# Altium PCB sami_updated_v2_1.PcbDoc
Units mm, origin at the board's own origin, x right, y up, seen from the top; angles counter-clockwise.
Board outline 29.4 x 15.49 mm, 2 copper layers (Top Layer, Bottom Layer); 20 components, 23 nets, 104 pads, 44 vias.
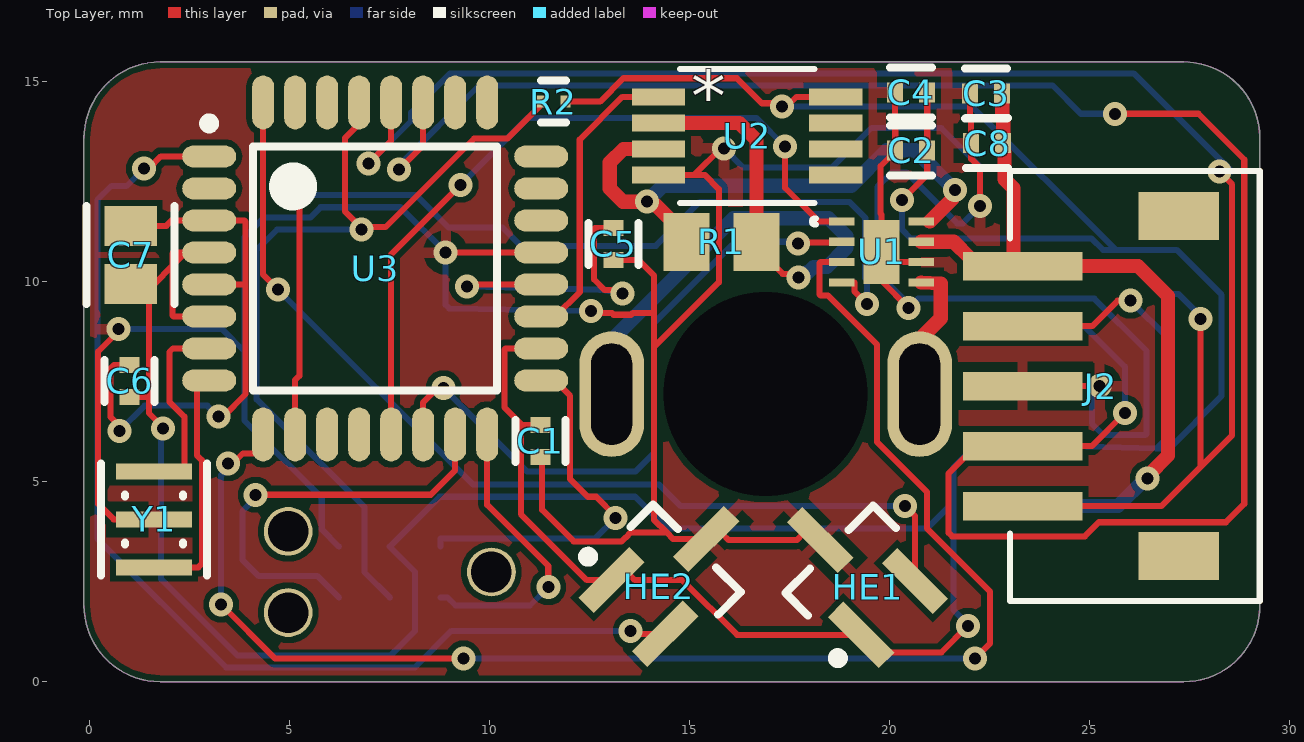
[diagram p0: Top Layer view]
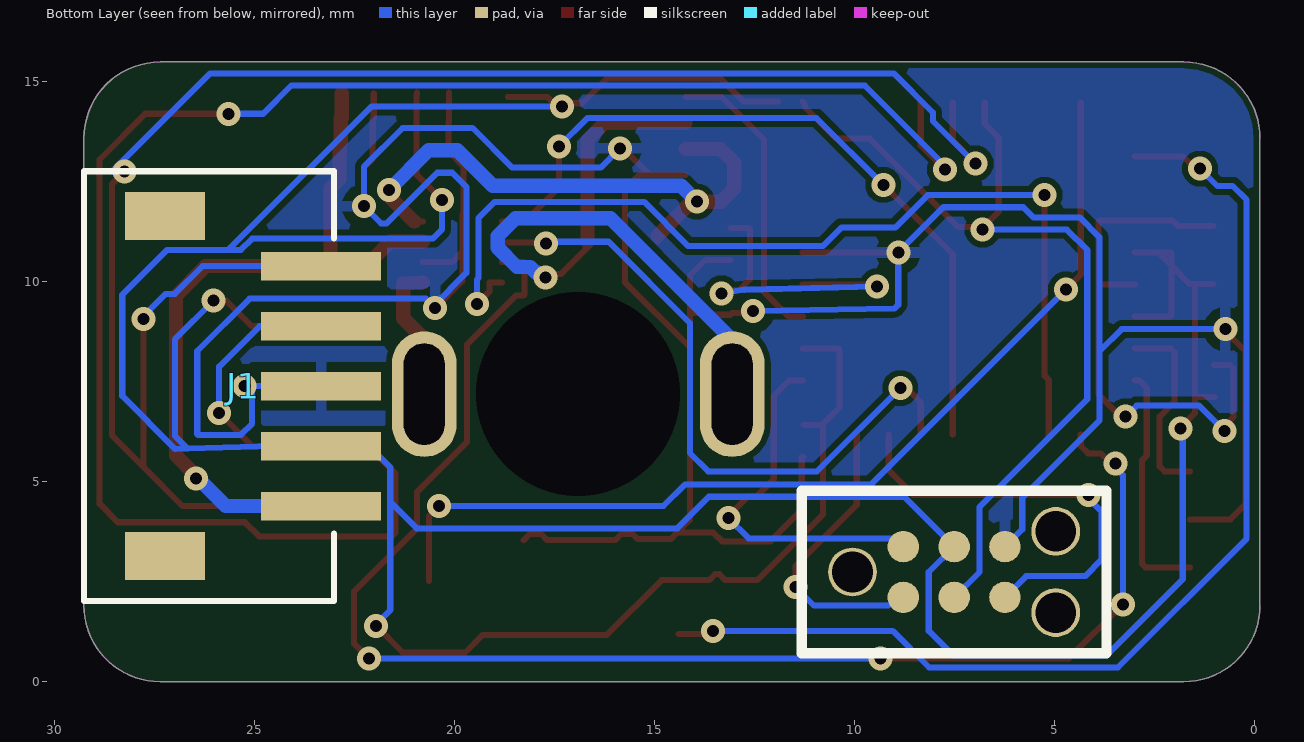
[diagram p1: Bottom Layer view, seen from below]
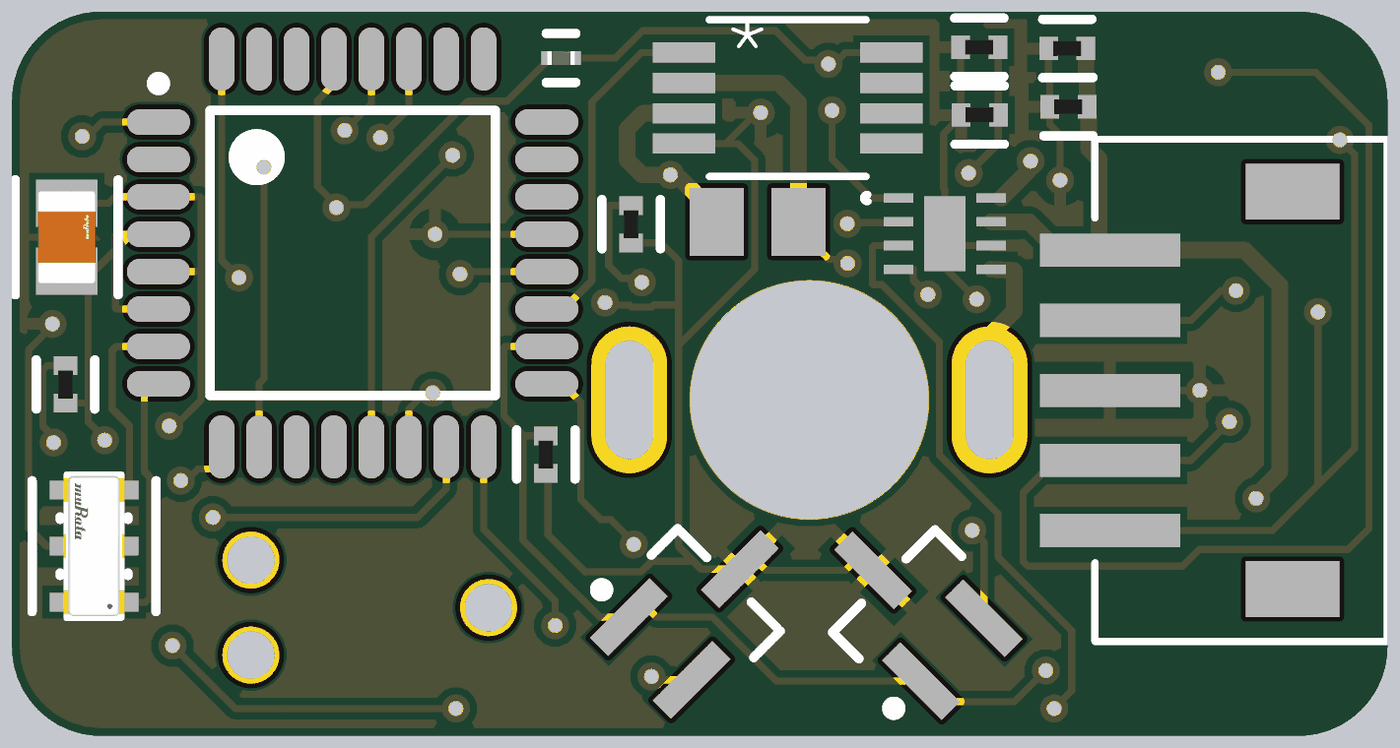
[diagram p2: 3D render of the assembled board from above, using the file's embedded part models]

## Layer stack, top to bottom
Top Solder: solder mask 0.0102, Solder Resist, Dk 3.5
Top Layer: signal copper 0.0356
Dielectric 1: dielectric 0.32, FR-4, Dk 4.8
Bottom Layer: signal copper 0.0356
Bottom Solder: solder mask 0.0102, Solder Resist, Dk 3.5

## Board outline
-0.127,1.905 ccw(c1.778,1.905) 1.778,0 27.368,0 ccw(c27.368,1.905) 29.273,1.905 29.273,13.589 ccw(c27.368,13.589) 27.368,15.494 1.778,15.494 ccw(c1.778,13.589) -0.127,13.589

## Design rules (kind name [scope] priority, off if disabled: settings)
Clearance Clearance_1 [All] p1: gap=0.152 ignorepadtopadclearanceinfootprint=FALSE except(0: Arc-Hole Track-Hole SMDPad-Hole THPad-Hole Via-Hole Fill-Hole Poly-Hole Region-Hole Text-Hole)
HoleSize [All] p1: absolutevalues=TRUE maxlimit=2.54 minlimit=0.3 maxpercent=80.000 minpercent=20.000
MinimumAnnularRing [All] p1: minimumring=0.2
PolygonConnect [All] p1: connectstyle=Relief reliefconductorwidth=0.254 reliefentries=4 polygonreliefangle="90 Angle" airgapwidth=0.254
RoutingVias [All] p1: holewidth=0.3 width=0.6 viastyle="Through Hole" minholewidth=0.3 minwidth=0.6 maxholewidth=0.3 maxwidth=0.6
SolderMaskExpansion [All] p1: expansion=0.102 istentingtop=FALSE
Width [All] p1: maxlimit=0.381 minlimit=0.152 preferedwidth=0.152 minimp=50.000000 maximp=50.000000 favimp=50.000000
29 further rules are at their usual default settings.

## Components (designator, comment, footprint, x,y, rotation, side; value= is the part's Value field where it differs from the comment)
* "Poluou motor" PCBComponent_1 20.766,7.188 r180 top
C1 "GRM155R71C104KA88D - 0.1 uF" FP-GRM15-MFG 11.284,6.02 r90 top value=0.10μF
C2 "GRM155R71C104KA88D - 0.1 uF" FP-GRM15-MFG 20.555,13.284 r0 top value=0.10μF
C3 "GRM155R71C104KA88D - 0.1 uF" FP-GRM15-MFG 22.428,14.707 r0 top value=0.10μF
C4 "GRM155R71C104KA88D - 0.1 uF" FP-GRM15-MFG 20.549,14.732 r0 top value=0.10μF
C5 "GRM155R71C104KA88D - 0.1 uF" FP-GRM15-MFG 13.106,10.947 r90 top value=0.10μF
C6 "GRM155R71C104KA88D - 0.1 uF" FP-GRM15-MFG 1.016,7.518 r270 top value=0.10μF
C7 "GRM21BR61E106KA73L - 10 uF" FP-GRM21B-0_15-IPC_C 1.041,10.668 r90 top
C8 "GRM155R71C104KA88D - 0.1 uF" FP-GRM15-MFG 22.454,13.462 r0 top value=0.10μF
ContactPad "6 Pin Contact Pad" 6PinContactPad 2.184,2.235 r90 bottom
HE1 "TLE4946-2K" INF-PG-SC59_M 19.126,2.692 r135 top
HE2 "TLE4946-2K" INF-PG-SC59_M 14.58,2.718 r45 top
J1 "S5B-ZR-SM4A-TF (LF) (SN)" CONN_S5B-ZR-SM4A-TF_JST 23.343,4.39 r90 bottom
J2 "S5B-ZR-SM4A-TF (LF) (SN)" CONN_S5B-ZR-SM4A-TF_JST 23.343,10.391 r270 top
R1 "RL1220S-R27-F - 0.27 Ohm - 1/3W" RESC2013X50X40NL20T20 15.81,10.998 r0 top
R2 "ERJ-1GNF1002C - 10kOhm" FP-ERJ1G-MFG 11.608,14.503 r0 top value=10kΩ
U1 "A3910EEETR-T" DFN-8_ALM 19.812,10.744 r0 top
U2 "INA2180A1IDGKR" DGK8_TEX 16.453,13.645 r0 top
U3 "ATmega328-AU" 32A_L 7.153,10.332 r0 top
Y1 "CSTNE16M0V53C000R0 - 16 MHz Crystal" FP-CSTNE16M0V53C000R0-MFG 1.626,4.058 r270 top

## Footprints (in the part's own frame and the unit in brackets; to place one, negate y for a bottom-side part, rotate by r counter-clockwise, add the part's x,y. Pads: shape width x height; smd on the part's side, far side on the other; paste and mask are expansions set on the pad)
6PinContactPad [mil]
  round 30.98 smd: 1(-5,260) 2(45,260) 3(-5,210) 4(45,210) 5(-5,160) 6(45,160)
  round 48 hole 40 unplated: 25(20,310) 26(-20,110) 27(60,110)
  silkscreen extent -60,60 100,360
32A_L [mm] "Thin QFP, 32-Leads, Body 7x7mm, Pitch 0.8mm, IPC High Density"
  oval 1.35x0.55 smd: 1(-4.15,2.8) 2(-4.15,2) 3(-4.15,1.2) 4(-4.15,0.4) 5(-4.15,-0.4) 6(-4.15,-1.2) 7(-4.15,-2) 8(-4.15,-2.8) 17(4.15,-2.8) 18(4.15,-2) 19(4.15,-1.2) 20(4.15,-0.4) 21(4.15,0.4) 22(4.15,1.2) 23(4.15,2) 24(4.15,2.8)
  oval 0.55x1.35 smd: 9(-2.8,-4.15) 10(-2,-4.15) 11(-1.2,-4.15) 12(-0.4,-4.15) 13(0.4,-4.15) 14(1.2,-4.15) 15(2,-4.15) 16(2.8,-4.15) 25(2.8,4.15) 26(2,4.15) 27(1.2,4.15) 28(0.4,4.15) 29(-0.4,4.15) 30(-1.2,4.15) 31(-2,4.15) 32(-2.8,4.15)
  silkscreen extent -4.27,-3.05 3.05,3.75, body extent -3.5,-3.5 3.5,3.5, height 1.2
CONN_S5B-ZR-SM4A-TF_JST [mil]
  rect 28x118 smd paste+0 mask+0: 1(0,0) 2(59.06,0) 3(118.11,0) 4(177.17,0) 5(236.22,0)
  rect 47x79 smd: 6(-49.21,153.62) 7(285.43,153.62)
  silkscreen extent -93,-13 330,233, body extent 0,0 10,10, height 10
DFN-8_ALM [mil]
  rect 25x8 smd paste+0 mask+0: 1(-39,30) 2(-39,10) 3(-39,-10) 4(-39,-30) 5(39,-30) 6(39,-10) 7(39,10) 8(39,30)
  rect 35x63 smd paste+0 mask+0: 9(0,0)
  silkscreen extent -68,27 -65,33, body extent 0,0 10,10, height 10
DGK8_TEX [mil]
  rect 52.5x17 smd paste+0 mask+0: 1(-87.25,38.39) 2(-87.25,12.8) 3(-87.25,-12.8) 4(-87.25,-38.39) 5(87.25,-38.39) 6(87.25,-12.8) 7(87.25,12.8) 8(87.25,38.39)
  silkscreen extent -66,-66 66,66, body extent 0,0 10,10, height 10
FP-CSTNE16M0V53C000R0-MFG [mm]
  rect 0.4x1.9 smd paste+0 mask+0: 1(-1.2,0) 2(0,0) 3(1.2,0)
  silkscreen extent -1.4,-1.33 1.4,1.33, body extent -1.6,-0.65 1.6,0.65, height 1
FP-ERJ1G-MFG [mm]
  rect 0.25x0.3 smd paste+0 mask+0: 1(-0.3,0) 2(0.3,0)
  silkscreen extent -0.32,-0.53 0.32,0.53, body extent -0.53,-0.27 0.53,0.27, height 0.25
FP-GRM15-MFG [mm]
  rect 0.4x0.5 smd paste+0 mask+0: 1(-0.4,0) 2(0.4,0)
  silkscreen extent -0.53,-0.62 0.53,0.62, body extent -0.7,-0.38 0.7,0.38, height 0.25
FP-GRM21B-0_15-IPC_C [mm]
  rect 1.006x1.308 smd paste+0 mask+0: 1(-0.726,0) 2(0.726,0)
  silkscreen extent -1.23,-1.1 1.23,1.1, body extent -1,-0.63 1,0.63, height 1.4
INF-PG-SC59_M [mm] "SOT23, 3-Leads, Body 3x1.53mm, Pitch 0.95mm, IPC Low Density"
  rect 1.8x0.55 smd: 1(-1.2,0.95) 2(-1.2,-0.95) 3(1.2,0)
  silkscreen extent -1.32,-1.55 0.88,1.9, body extent -0.88,-1.55 0.88,1.55, height 1.35
PCBComponent_1 [mm]
  round 0 hole 5.1: 28(3.85,0)
  rrect100% 1.62x3.14 hole 1.02 slot 2.54 at 90 deg: m+(7.7,0) m-(0,0)
RESC2013X50X40NL20T20 [mm] "Chip Resistor, 2-Leads, Body 2.00x1.25mm, IPC Medium Density"
  rect 1.15x1.45 smd: 1(-0.875,0) 2(0.875,0)
  body extent -1.1,-0.72 1.1,0.72, height 0.5

## Part data
C1 C2 C3 C4 C5 C6 C8: library part CMP-2100-03641-2, "CAP CER 0.1UF 16V X7R 0402", Capacitance=0.10μF, Manufacturer=Murata, Manufacturer Part Number=GRM155R71C104KA88D, Package=GRM15, Temperature="-55°C to +125°C", Temperature Characteristic=X7R, Temperature Range High=+125°C, Temperature Range Low=-55°C, Tolerance=10%, Voltage Rating=16Vdc, Category=Cap, ComponentLink2Description=Datasheet, ComponentLink2URL=https://search.murata.co.jp/Ceramy/image/img/A01X/G101/ENG/GRM155R71H471KA01-01A.pdf, Device Class L1="Passive Components", Device Class L2=Capacitors, Device Class L3="Ceramic Capacitors", Digikey Description="CAP CER 0.1UF 16V X7R 0402", Height=0.55mm, Ipc Land Pattern Name=CAPC10050X219, Lead Free=yes, Material=Ceramic, Mouser Description="0402 0.1 uF 16V ±10 % Tolerance X7R SMT Multilayer Ceramic Capacitor", Octopart=https://octopart.com/grm155r71c104ka88d-murata-196880, RoHS=TRUE, Standoff Height=0mm
C7: library part CMP-2007-03541-2, "Chip Multilayer Ceramic Capacitors for General Purpose, 0805, 10uF, X5R, 15%, 10%, 25V", Capacitance=10uF, Case Code (Imperial)=0805, Case Code (Metric)=2012, Dielectric=X5R, Max Operating Temperature=85°C, Min Operating Temperature=-55°C, Package Quantity=1, Tolerance=10%, Voltage=25V, Case/Package=0805, Depth=1.25mm, Height=1.25mm, Lead Free="Lead Free", Length=2mm, Material=Ceramic, Mount="Surface Mount", Packaging="Tape and Reel", Radiation Hardening=No, Termination=SMD/SMT, Thickness=0.053inch, Voltage Rating=25V, Voltage Rating (DC)=25V, Width=0.049inch
HE1 HE2: library part CMP-1148-00006-1, "High Precision Hall Effect Latch, PG-SC59, Reel, Green", Manufacturer=Infineon, Bhyst (25degreesC) max="4Â mT", Bop (25degreesC) min="2Â mT", Brp (25degreesC) typ="-2Â mT", Chopped Hall Technology=TRUE, ComponentLink1Description="Manufacturer URL", ComponentLink1URL=http://www.infineon.com/, ComponentLink2Description=Datasheet, ComponentLink2URL=http://www.infineon.com/dgdl/TLE4946-2K_DS_Rev1.pdf?folderId=db3a30431f848401011facc1c83b4674&fileId=db3a30431f848401011fbc925c48637f, ComponentLink3Description="Package Specification", ComponentLink3URL=http://www.infineon.com/dgdl/SC59-Package_Overview.pdf?folderId=db3a30431936bc4b01194dc0d34440b0&fileId=db3a30431936bc4b01194dd1aa1d40cf, DatasheetVersion="Rev. 1.0", Direction Detection=FALSE, Green=TRUE, Interface="open collector", Mounting Technology="Surface Mount", PackageDescription="3-Pin Semiconductor Package, 3 x 1.53 mm Body, 0.95 mm Pitch", PackageReference=PG-SC59, PackageVersion=Mar-08, Packing=Reel, PartNumber=TLE4946-2K, Target Application=Automotive, Type=Latch
J1 J2: "No Description Available", Mfr_Name=JST, Copyright="Copyright (C) 2021 Ultra Librarian. All rights reserved.", Manufacturer_Part_Number="S5B-ZR-SM4A-TF (LF) (SN)", RefDes=RefDes, Type=DEV
R1: library part CMP-2001-03162-1, Manufacturer=Susumu, Part Number=RL1220S-R27-F
R2: library part CMP-2004-03445-2, "RES SMD 10K OHM 1% 1/20W 0201", Manufacturer="Panasonic Electronic Components", Manufacturer Part Number=ERJ-1GNF1002C, Package=ERJ1G, Power Rating=0.05W, Resistance=10kΩ, Temperature="-55°C to +125°C", Temperature Coefficient=200ppm/°C, Temperature Range High=+125°C, Temperature Range Low=-55°C, Tolerance=1%, Voltage Rating=25V, Automotive=Yes, Automotive Grade="Grade 1", Category=Res, ComponentLink2Description=Datasheet, ComponentLink2URL=https://industrial.panasonic.com/cdbs/www-data/pdf/RDA0000/AOA0000C304.pdf, Composition="Thick Film", Device Class L1="Passive Components", Device Class L2=Resistors, Device Class L3="Chip SMD Resistors", Digikey Description="RES SMD 10K OHM 1% 1/20W 0201", Footprint Url=https://industrial.panasonic.com/cdbs/www-data/pdf/RDA0000/DMA0000COL17.pdf, Height=0.26mm, Lead Free=Yes, Mouser Description="Thick Film Resistors - SMD 0201 10Kohm 1% HalogenFree AEC-Q200", Octopart=https://octopart.com/erj-1gnf1002c-panasonic-55419697, RoHS=TRUE, Series=ERJ
U1: "No Description Available", Mfr_Name="Allegro Microsystems Inc.", Copyright="Copyright (C) 2021 Ultra Librarian. All rights reserved.", Manufacturer_Part_Number=A3910EEETR-T, RefDes=RefDes, Type=DEV
U2: "No Description Available", Mfr_Name="Texas Instruments", Copyright="Copyright (C) 2021 Ultra Librarian. All rights reserved.", Manufacturer_Part_Number=INA2180A1IDGKR, RefDes=RefDes, Type=DEV
U3: library part CMP-0095-00261-2, "8-bit AVR Microcontroller, 32KB Flash, 1KB EEPROM, 2KB SRAM, 32-pin TQFP, Industrial Grade (-40°C to 85°C)", Code_JEDEC=MS-026-ABA, ComponentLink1Description="Manufacturer URL", ComponentLink1URL=http://www.atmel.com/, ComponentLink2Description="ATmega48A/48PA/88A/88PA/168A/168PA/328/328P Datasheet", ComponentLink2URL=http://www.atmel.com/dyn/resources/prod_documents/doc8271.pdf, ComponentLink3Description="ATmega48A/48PA/88A/88PA/168A/168PA/328/328P Summary", ComponentLink3URL=http://www.atmel.com/dyn/resources/prod_documents/8271S.pdf, DatasheetVersion="revD, May-2011", PackageDescription="32-Lead, 7x7x1.0 mm Body, 0.8mm Lead Pitch, Thin Profile Plastic Quad Flat Package (TQFP)", PackageReference=32A, PackageVersion="revC, Oct-2010", RevisionNote="DatasheetVersion & PackageVersion updated. URLs added."
Y1: library part CMP-06057-000009-1, "CERAMIC RES 16.0000MHZ 15PF SMD", Capacitance=15pF, Case/Package=SMD/SMT, Frequency=16MHz, Frequency Stability=0.15%, Frequency Tolerance=0.5%, Max Operating Temperature=125°C, Min Operating Temperature=-40°C, Resistor Type=Ceramic, Impedance=40R, Mount="Surface Mount", Packaging="Tape and Reel"

## Via types
v1: diameter 0.6, hole 0.3, Top Layer to Bottom Layer, tented both sides, 44 vias

## Nets (pads, with @x,y where several pads share a name; then routed paths per layer and width w, separated by ;. In a path a pad name is that pad's centre, name@x,y a point inside that pad or via, vN(x,y) a via of type N, cw(c..) or ccw(c..) an arc to the next point about the centre after c; other vN are vias at no path point)
CUR1_TO_OPAMP_IN+: R1.1 U1.8 U2.3 | length 14.5
  Top Layer w0.152: v1@13.945,12.065 14.094,11.916 v1@14.167,11.916 ; R1.1 R1.1@14.935,11.148 ; U1.8 U1.8@21.018,11.506 ; v1@21.581,12.068 21.581,12.232 v1(21.644,12.296)
  Top Layer w0.356: v1(13.945,12.002) 13.348,12.002 13.018,12.332 13.018,12.977 13.36,13.32 U2.3 ; v1@14.167,11.916 R1.1@14.935,11.148 ; U1.8@21.018,11.506 v1@21.581,12.068
  Bottom Layer w0.356: v1(13.945,12.002) 14.343,12.4 19.055,12.4 19.939,13.284 20.656,13.284 v1(21.644,12.296)
CURRENT_IN: U2.1 U3.19 | length 7.4
  Top Layer w0.152: U3.19 11.661,9.132 12.268,9.739 12.268,13.553 13.335,14.62 U2.1
GND: C1.1 C2.1 C3.1 C4.1 C5.1 C8.1 ContactPad.6 HE1.3 HE2.3 J1.3 J2.3 U1.6 U1.9 U2.4 U3.21 Y1.2 | length 97.1
  Top Layer w0.152: v1(0.737,8.814) 0.737,8.763 0.229,8.255 0.229,4.445 0.616,4.058 Y1.2 ; v1(8.915,10.732) U3.21 ; C1.1 11.328,5.62 11.328,4.297 12.116,3.51 13.316,3.51 13.407,3.6 13.415,3.6 13.548,3.734 14.438,3.734 ; v1(12.548,9.271) 12.605,9.214 13.076,9.214 13.115,9.175 13.553,9.175 13.598,9.22 14.122,9.22 ; C5.1 13.735,10.547 14.122,10.16 14.122,9.22 ; U2.4 15.134,12.67 ; v1(15.875,13.335) 15.799,13.335 15.134,12.67 ; HE1.3 18.125,3.693 17.844,3.693 17.692,3.541 15.989,3.541 15.836,3.693 15.555,3.693 HE2.3 14.605,3.566 14.438,3.734 ; C4.1 20.149,14.002 20.155,13.995 C2.1 20.155,13.259 19.787,12.89 19.787,11.709 19.812,11.684 U1.9 ; v1@20.542,9.392 v1(20.491,9.341) 19.812,10.02 U1.9 ; U1.6 20.066,10.49 U1.9 ; C3.1 22.028,14.097 22.054,14.072 C8.1 22.056,13.46 22.056,13.073 22.276,12.852 v1(22.276,11.887) ; J2.3 v1(25.26,7.391) ; 14.122,8.357 14.122,4.049 14.438,3.734 ; 14.122,8.357 14.122,9.22 ; 14.122,8.357 15.748,9.982 15.748,12.314 15.392,12.67 15.134,12.67
  Bottom Layer w0.152: v1(0.737,8.814) 3.327,8.814 3.886,8.255 ; ContactPad.6 5.817,3.81 5.817,4.597 3.886,6.528 3.886,8.255 ; v1(12.548,9.271) 9.005,9.332 8.915,9.421 8.915,9.423 v1(8.915,10.732) 7.785,11.862 5.791,11.862 5.537,11.608 4.381,11.608 3.886,11.112 3.886,8.255 ; v1(15.875,13.335) 16.358,12.852 18.567,12.852 19.558,13.843 21.304,13.843 22.276,12.871 v1(22.276,11.887) v1(22.276,11.887) 21.848,11.46 21.705,11.46 20.44,12.725 20.065,12.725 19.71,12.371 19.71,10.223 v1@20.542,9.392 ; v1(20.491,9.341) v1@20.542,9.392 ; J1.3 v1@25.044,7.39 ; v1(25.26,7.391) 25.259,7.39 v1@25.044,7.39 ; v1@20.542,9.392 20.726,9.576 25.133,9.576 26.441,8.268 26.441,6.198 26.416,6.172 25.349,6.172 25.07,6.452 25.07,7.365 v1@25.044,7.39
INPUT1: U1.1 U3.13 | length 18.9
  Top Layer w0.152: U3.13 7.553,10.684 v1(9.29,12.421) ; v1(17.399,13.381) 17.399,12.344 18.237,11.506 U1.1
  Bottom Layer w0.152: v1(9.29,12.421) 10.96,14.091 16.689,14.091 v1(17.399,13.381)
INPUT2: U1.2 U3.14 | length 16.6
  Top Layer w0.152: U3.14 8.353,6.985 8.709,7.341 v1(8.865,7.341) ; v1(17.728,10.957) 17.748,10.978 18.801,10.978 U1.2
  Bottom Layer w0.152: v1(8.865,7.341) 10.947,5.258 13.665,5.258 14.122,5.715 14.122,8.963 16.157,10.998 17.687,10.998 v1(17.728,10.957)
INPUT3: U1.3 U3.9 | length 36.8
  Top Layer w0.152: v1(3.302,1.93) 4.648,0.584 v1(9.36,0.584) ; v1(3.48,5.461) 3.601,5.461 3.849,5.709 4.169,5.709 4.353,5.893 U3.9 ; U1.3 18.288,10.49 18.263,10.465 18.263,9.677 18.288,9.652 18.475,9.652 19.695,8.432 19.695,5.997 20.951,4.741 20.951,3.828 22.525,2.254 22.525,0.96 v1(22.149,0.584)
  Bottom Layer w0.152: v1(3.302,1.93) 3.302,5.162 3.48,5.34 v1(3.48,5.461) ; v1(9.36,0.584) v1(22.149,0.584)
INPUT4: U1.4 U3.10 | length 24.5
  Top Layer w0.152: U3.10 5.153,7.544 5.258,7.649 v1(5.258,12.167) ; U1.4 19.139,9.982 19.139,9.754 v1(19.45,9.442)
  Bottom Layer w0.152: v1(5.258,12.167) 8.179,12.167 8.992,11.354 10.338,11.354 10.795,10.897 14.173,10.897 15.27,11.994 19.007,11.994 19.406,11.595 19.406,10.097 19.45,10.053 v1(19.45,9.442)
M+: *.m+ R1.2 U2.2 | length 17.2
  Top Layer w0.152: R1.2 16.685,10.848 17.339,10.195 17.648,10.195 v1(17.734,10.109)
  Top Layer w0.356: U2.2 16.256,13.97 16.685,13.541 R1.2
  Bottom Layer w0.152: *.m+ *.m+@13.066,8.545 ; v1(17.734,10.109) v1@17.855,10.109
  Bottom Layer w0.356: *.m+@13.066,8.545 16.108,11.587 18.486,11.587 18.928,11.145 18.928,10.851 18.447,10.37 18.116,10.37 17.977,10.231 17.922,10.231 17.847,10.156 v1@17.847,10.109
M-: *.m- U1.5 | length 3.5
  Top Layer w0.152: *.m- *.m-@20.766,8.56
  Top Layer w0.356: *.m-@20.766,8.56 21.293,9.087 21.293,9.957 U1.5
MISO: ContactPad.1 U3.16 | length 7.4
  Top Layer w0.152: U3.16 9.953,4.423 11.481,2.896 v1(11.481,2.362)
  Bottom Layer w0.152: ContactPad.1 8.96,2.108 9.163,1.905 11.024,1.905 v1(11.481,2.362)
MOSI: ContactPad.5 U3.15 | length 10.7
  Top Layer w0.152: v1(4.166,4.674) 8.543,4.674 9.153,5.283 U3.15
  Bottom Layer w0.152: v1(4.166,4.674) 4.166,4.586 3.835,4.256 3.835,3.048 4.242,2.642 5.715,2.642 ContactPad.5
NetC5_2: C5.2 U3.20 | length 8.4
  Top Layer w0.152: v1(9.449,9.881) 9.5,9.932 U3.20 ; C5.2 12.649,11.347 12.624,11.322 12.624,10.058 12.893,9.79 13.248,9.79 v1(13.334,9.704)
  Bottom Layer w0.152: v1(9.449,9.881) 12.767,9.8 v1(13.334,9.704)
NetC6_1: C6.1 C7.2 U3.3 U3.5 | length 14.1
  Top Layer w0.152: v1(0.762,6.274) 0.762,6.395 0.533,6.624 0.533,7.829 0.623,7.918 C6.1 ; C7.2 1.93,11.394 2.068,11.532 U3.3 3.886,11.532 3.912,11.506 3.912,9.957 3.886,9.932 ; U3.5 3.886,9.932 ; v1(3.232,6.629) 3.353,6.629 3.912,7.188 3.912,9.906 3.886,9.932
  Bottom Layer w0.152: v1(0.762,6.274) 1.392,6.904 2.957,6.904 v1(3.232,6.629)
NetU3_7: U3.7 Y1.1 | length 4.9
  Top Layer w0.152: Y1.1 2.259,5.258 2.383,5.382 2.383,6.626 2.01,6.998 2.01,8.243 2.099,8.332 U3.7
NetU3_8: U3.8 Y1.3 | length 6.1
  Top Layer w0.152: Y1.3 2.73,2.858 2.819,2.947 2.819,5.537 2.703,5.654 2.703,7.348 2.887,7.532 U3.8
Q1: HE1.2 U3.32 | length 24.7
  Top Layer w0.152: U3.32 4.353,10.176 v1(4.724,9.804) ; v1(20.396,4.394) 20.646,4.144 HE1.2
  Bottom Layer w0.152: v1(4.724,9.804) 9.6,4.928 14.25,4.928 14.784,4.394 v1(20.396,4.394)
Q2: HE2.2 U3.1 | length 27.7
  Top Layer w0.152: v1(1.372,12.827) 1.493,12.827 1.798,13.132 U3.1 ; v1(13.542,1.27) 13.614,1.198 HE2.2
  Bottom Layer w0.152: v1(1.372,12.827) 0.937,12.393 0.556,12.393 0.208,12.044 0.208,3.577 3.429,0.356 8.144,0.356 9.059,1.27 v1(13.542,1.27)
RESET: ContactPad.3 R2.1 U3.29 | length 22.3
  Top Layer w0.152: U3.29 6.753,13.946 6.402,13.595 6.402,11.753 6.807,11.348 v1(6.807,11.303) 6.871,11.367 7.412,11.367 9.624,13.578 10.46,13.578 11.259,14.377 11.259,14.455 R2.1
  Bottom Layer w0.152: v1(6.807,11.303) 4.699,11.303 4.191,10.795 4.191,7.061 6.883,4.369 6.883,2.743 ContactPad.3
SCK: ContactPad.2 U3.17 | length 9.3
  Top Layer w0.152: U3.17 11.64,7.532 12.028,7.144 12.028,5.066 12.471,4.623 12.679,4.623 13.162,4.141 v1(13.162,4.095)
  Bottom Layer w0.152: ContactPad.2 8.788,3.581 12.657,3.581 13.162,4.086 v1(13.162,4.095)
SCL: J1.5 J2.5 U3.28 | length 47.2
  Top Layer w0.152: v1(6.985,12.954) 7.553,13.522 U3.28 ; J2.5 26.81,4.391 27.788,5.369 ; v1(27.788,9.068) 27.788,5.369 ; v1(28.258,12.751) 28.575,12.433 28.575,6.157 27.788,5.369
  Bottom Layer w0.152: v1(6.985,12.954) 8.05,14.019 8.05,14.231 9.028,15.21 26.116,15.21 26.187,15.138 28.575,12.751 v1(28.258,12.751) ; J1.5 26.31,10.39 27.004,9.696 27.23,9.696 27.788,9.139 v1(27.788,9.068)
SDA: J1.4 J2.4 U3.27 | length 51.8
  Top Layer w0.152: v1(7.747,12.802) 8.353,13.408 U3.27 ; v1(25.654,14.199) 27.737,14.199 28.88,13.056 28.88,4.445 28.423,3.988 25.248,3.988 24.892,3.632 21.578,3.632 21.488,3.721 21.488,5.207 22.173,5.891 J2.4 25.068,5.891 v1(25.895,6.718)
  Bottom Layer w0.152: v1(7.747,12.802) 7.747,12.903 9.749,14.905 24.089,14.905 24.795,14.199 v1(25.654,14.199) ; J1.4 24.879,8.89 25.895,7.874 v1(25.895,6.718)
VCC: C1.2 C2.2 C4.2 C6.2 C7.1 ContactPad.4 HE1.1 HE2.1 J1.2 J2.2 R2.2 U2.8 U3.4 U3.6 U3.18 | length 107.7
  Top Layer w0.152: C6.2 1.473,7.118 1.499,7.144 ; C7.1 C7.1@1.499,9.942 ; v1(1.854,6.325) 1.854,6.361 1.499,6.717 1.499,7.144 ; U3.6 2.108,9.132 2.083,9.157 2.083,10.399 ; U3.4 U3.4@2.416,10.732 ; C1.2 10.82,6.42 ; U3.18 10.414,8.332 10.389,8.306 10.389,6.852 10.82,6.42 ; R2.2 12.776,14.503 13.36,15.088 16.195,15.088 16.82,14.462 17.237,14.462 v1(17.323,14.376) 17.444,14.376 17.687,14.619 U2.8 U2.8 ; v1(20.32,12.04) 20.955,12.675 C2.2 20.955,14.681 20.949,14.681 C4.2 ; v1(21.971,1.397) 21.304,0.73 19.745,0.73 HE1.1 16.201,1.172 14.833,2.541 13.645,2.541 13.493,2.693 13.389,2.693 13.237,2.541 12.445,2.541 10.795,4.191 10.795,6.394 10.82,6.42 ; J2.2 25.082,8.891 25.716,9.525 v1(26.035,9.525) ; 1.499,7.144 C7.1@1.499,9.942 ; C7.1@1.499,9.942 1.626,9.942 2.083,10.399 ; 2.083,10.399 2.083,10.706 2.108,10.732 U3.4@2.416,10.732 ; 2.083,10.399 U3.4@2.416,10.732
  Bottom Layer w0.152: v1(1.854,6.325) 1.803,6.274 1.803,2.565 3.708,0.66 7.544,0.66 8.153,1.27 8.153,2.743 ContactPad.4 8.764,4.624 13.652,4.624 14.441,3.835 20.955,3.835 21.615,4.496 ; v1(17.323,14.376) 22.085,14.376 25.667,10.795 ; v1(20.32,12.04) 20.32,11.308 20.549,11.079 25.065,11.079 25.349,10.795 25.667,10.795 ; v1(21.971,1.397) 21.971,1.433 21.615,1.789 21.615,4.496 ; v1(26.035,9.525) 27,8.56 27,6.147 26.679,5.826 ; 21.615,4.496 21.615,5.359 22.146,5.89 J1.2 24.486,5.89 26.679,5.826 ; 25.667,10.795 27.191,10.795 28.316,9.67 28.316,7.145 26.987,5.817 26.679,5.826
VM: C3.2 C8.2 J1.1 J2.1 U1.7 | length 19.5
  Top Layer w0.152: J2.1@22.222,10.391 J2.1 J2.1@23.109,10.625 ; 22.828,14.097 22.854,14.072 ; C8.2 C8.2@22.885,13.43
  Top Layer w0.356: U1.7 21.615,10.998 22.022,10.592 22.022,10.569 22.2,10.391 J2.1@22.222,10.391 ; 22.828,14.097 C3.2 ; C8.2 22.854,14.072 ; C8.2@22.876,13.43 22.876,13.241 22.885,13.232 22.885,12.563 23.109,12.339 J2.1@23.109,10.625 ; J2.1 26.226,10.391 26.975,9.642 26.975,5.654 26.467,5.146 v1(26.467,5.08)
  Bottom Layer w0.356: J1.1 25.727,4.39 26.417,5.08 v1(26.467,5.08)
pads on no net: *.28 ContactPad.25 ContactPad.26 ContactPad.27 J1.6 J1.7 J2.6 J2.7 U2.5 U2.6 U2.7 U3.2 U3.11 U3.12 U3.22 U3.23 U3.24 U3.25 U3.26 U3.30 U3.31

## Polygon pours and split planes (outlines as drawn)
GND on Bottom Layer "GND_L02_P002" (solid, remove dead copper, pour order 2): -1.702,17.272 -0.381,18.593 33.807,18.593 33.807,-4.826 34.9,-5.918 33.528,-7.29 -1.575,-7.29
GND on Top Layer "GND_L01_P000" (solid, remove dead copper, pour order 0): -2.286,16.942 -1.905,17.323 30.404,17.323 30.404,-0.864 31.852,-2.311 31.648,-2.515 -1.905,-2.515

## Keep-outs
Keep-Out Layer:
  the board outline again, w0.013

## Text inside footprints (layer, text, board x,y; h text height)
U2: Top Overlay "*" at 15.056,14.026 h1.27; Mechanical 13 "*" at 14.967,13.848 h1.27